# EAGLE board ZEROSTICK (EAGLE 9.6.2)
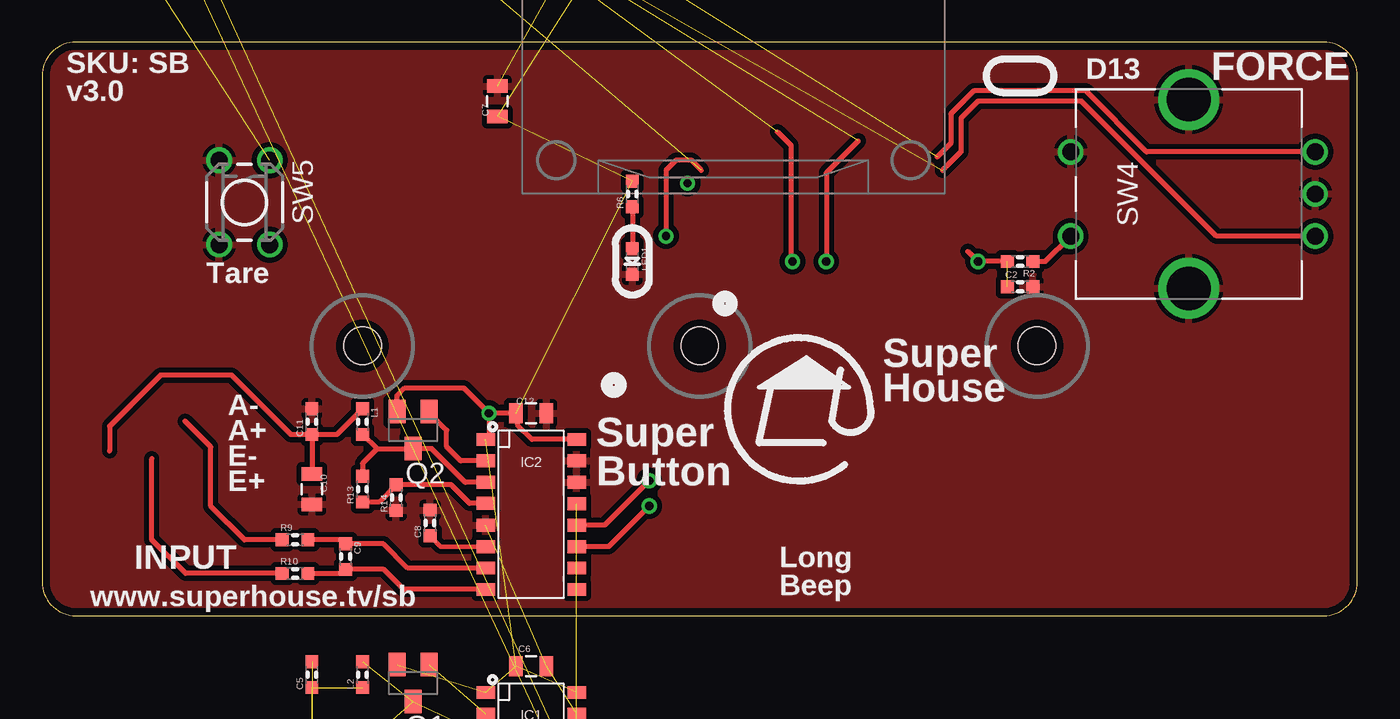
[diagram p0: board, top side]
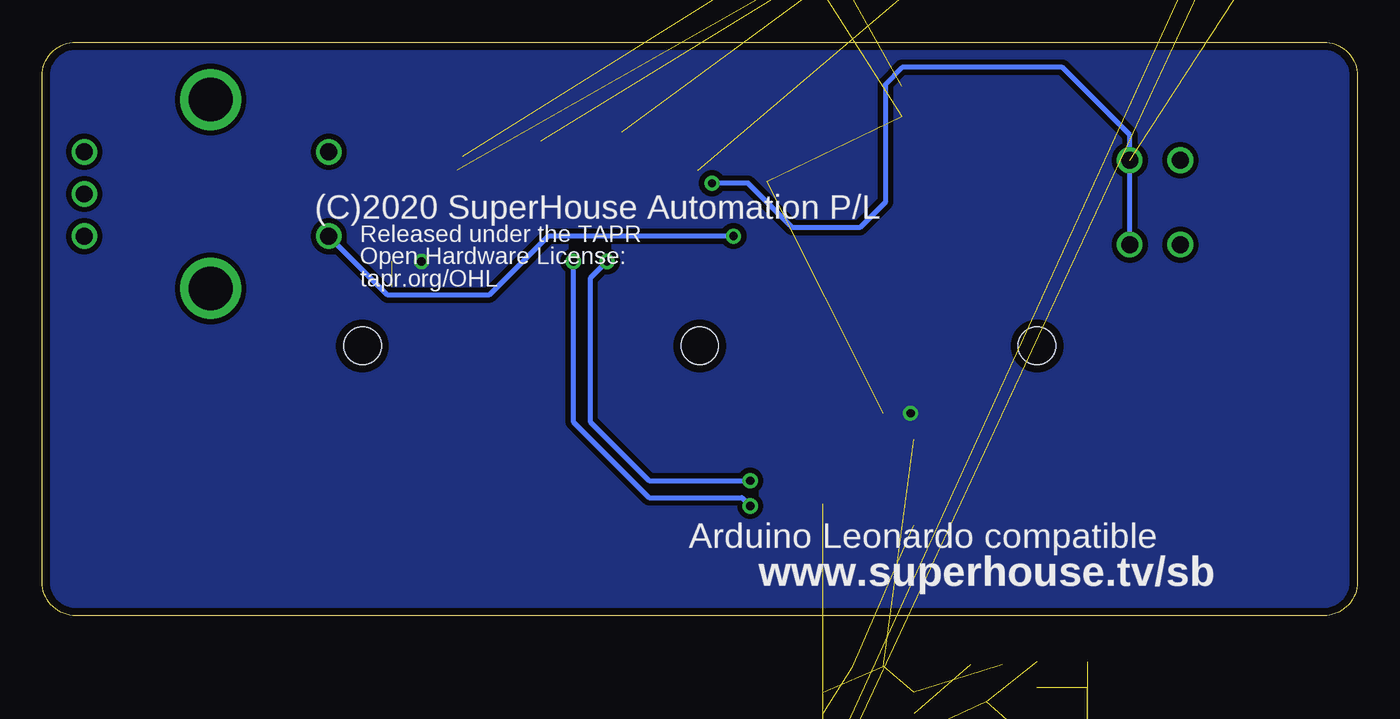
[diagram p1: board, bottom side, seen from below]

Size 78 x 34 mm. Coordinates in mm from the lower left corner, seen from the top.
Outline: 76,34 2,34 arc90 0,32 0,2 arc90 2,0 76,0 arc90 78,2 78,32 arc90 76,34
Copper layers (1*16): Top 0.035mm / dielectric 1.5mm / Bottom 0.035mm
Design rules "default *": minimum track width 10mil, minimum drill 24mil, track to track 12mil, track to pad 12mil, pad to pad 12mil, via to via 12mil, smd to smd 8mil, copper to edge 18mil, drill to drill 8mil, minimum pad ring 10mil, minimum via ring 8mil, stop-mask expansion 4mil, vias tented up to drill 0mil, thermal gap 10mil
Holes 2.2 mm at 39,16 19,16 59,16

## Footprints (pad centres in the part's own frame; a part is rotated, then mirrored left to right if it is on the bottom)
C0603 = smd 0.762 x 0.762: 1 -0.762,0; 2 0.762,0
C0805 = smd 0.8 x 1.2: 1 -0.9,0; 2 0.9,0
SOP16-L = smd 1.1 x 0.76: 1 -2.7,4.445; 2 -2.7,3.175; 3 -2.7,1.905; 4 -2.7,0.66; 5 -2.7,-0.635; 6 -2.7,-1.905; 7 -2.7,-3.175; 8 -2.7,-4.445; 9 2.7,-4.445; 10 2.7,-3.175; 11 2.7,-1.905; 12 2.7,-0.635; 13 2.7,0.635; 14 2.7,1.905; 15 2.7,3.175; 16 2.7,4.445
L0603 = smd 0.762 x 0.762: 1 -0.762,0; 2 0.762,0
LED-0603 = smd 0.762 x 0.762: A -0.762,0; C 0.762,0
XIAO-SMT = smd 3.556 x 1.778: 1 -8.128,7.62; 2 -8.128,5.08; 3 -8.128,2.54; 4 -8.128,0; 5 -8.128,-2.54; 6 -8.128,-5.08; 7 -8.128,-7.62; 8 8.128,-7.62; 9 8.128,-5.08; 10 8.128,-2.54; 11 8.128,0; 12 8.128,2.54; 13 8.128,5.08; 14 8.128,7.62
OLED-128X64-0.96-HEADER = drill 1.016 pad 1.88 square: GND -3.81,10.58 | drill 1.016 pad 1.88: SCL 1.27,10.58; SDA 3.81,10.58; VCC -1.27,10.58
SOT23-BEC = smd 1 x 1.4: B -0.95,-1.1; C 0,1.1; E 0.95,-1.1
R0603 = smd 0.762 x 0.762: 1 -0.762,0; 2 0.762,0
PEC12R = drill 1: A -2.5,-7.5; B 2.5,-7.5; C 0,-7.5; SW1 -2.5,7; SW2 2.5,7 | drill 2.6: GND@1 -5.6,0; GND@2 5.6,0
TACTILE-PTH-4.5MM = drill 1.016: 1 -2.5,1.5; 2 2.5,1.5; 3 -2.5,-1.5; 4 2.5,-1.5

## Placement (x,y rotation side)
C1  100nF  [C0603]  23,-10.5 90 top  (outside the outline)
C2  100nF  [C0603]  58,19.5 0 top
C3  100nF  [C0603]  18,-11.5 270 top  (outside the outline)
C4  10uF  [C0805]  16,-7.5 90 top  (outside the outline)
C5  100nF  [C0603]  16,-3.5 90 top
C6  10uF  [C0805]  29,-3 0 top
C7  10uF  [C0805]  27,30.5 90 top
C8  100nF  [C0603]  23,5.5 90 top
C9  100nF  [C0603]  18,3.5 270 top
C10  10uF  [C0805]  16,7.5 270 top
C11  100nF  [C0603]  16,11.5 90 top
C12  10uF  [C0805]  29,12 0 top
IC1  HX711-SOP16L  [SOP16-L]  29,-9 0 top  (outside the outline)
IC2  HX711-SOP16L  [SOP16-L]  29,6 0 top
L1  3.3uH  [L0603]  19,11.5 270 top
L2  3.3uH  [L0603]  19,-3.5 90 top
LED1  BLUE  [LED-0603]  35,21 270 top
MOD1  XIAO-SMT  [XIAO-SMT]  11,51 0 top  (outside the outline)
MOD2  OLED-I2C-128X64-0.96-HEADER  [OLED-128X64-0.96-HEADER]  41,39 0 top  (outside the outline)
Q1  2N3906  [SOT23-BEC]  22,-4 180 top
Q2  2N3906  [SOT23-BEC]  22,11 180 top
R1  100R  [R0603]  15,-10.5 0 top  (outside the outline)
R2  10K  [R0603]  58,21 180 top
R3  100R  [R0603]  15,-12.5 0 top  (outside the outline)
R4  10K  [R0603]  19,-8.5 90 top  (outside the outline)
R5  8K2  [R0603]  21,-9 90 top  (outside the outline)
R6  4K7  [R0603]  35,25 90 top
R9  100R  [R0603]  15,4.5 0 top
R10  100R  [R0603]  15,2.5 0 top
R13  10K  [R0603]  19,7.5 90 top
R14  8K2  [R0603]  21,7 90 top
SW4  Sensitivity  [PEC12R]  68,25 90 top
SW5  Tare  [TACTILE-PTH-4.5MM]  12,24.5 270 top

## Library data of the parts
C1-C12 L1 L2 Q1 Q2 R1-R6 R9 R10 R13 R14 = SuperHouse-DiscreteSemi
IC1 IC2 = SuperHouse-ICs
LED1 = SuperHouse-LEDs
MOD1 = SuperHouse-Modules
MOD2 = SuperHouse-Displays
SW4 SW5 = SuperHouse-Switches

## Nets
3.3V: C2.1 C6.1 C7.1 C12.1 IC1.1 IC1.16 IC2.1 IC2.16 MOD1.12 MOD2.VCC Q1.E Q2.E R2.2 R6.2
5V: MOD1.14
D0: IC2.12 MOD1.1
D1: IC2.11 MOD1.2
D2: IC1.12 MOD1.3
D3: IC1.11 MOD1.4
D4_SDA: MOD1.5 MOD2.SDA
D5_SCL: MOD1.6 MOD2.SCL
D6_TX: MOD1.7 SW5.1 SW5.2
D7_RX: MOD1.8 R2.1 SW4.SW1
D8_SCK: MOD1.9 SW4.A
D9_MISO: MOD1.10 SW4.B
D10_MOSI: MOD1.11
GND: C1.2 C2.2 C4.2 C5.2 C6.2 C7.2 C8.2 C10.2 C11.2 C12.2 IC1.5 IC1.14 IC1.15 IC2.5 IC2.14 IC2.15 LED1.C MOD1.13 MOD2.GND R5.1 R14.1 SW4.C SW4.GND@1 SW4.GND@2 SW4.SW2 SW5.3 SW5.4
N$1: C3.1 IC1.7 R1.2
N$2: C3.2 IC1.8 R3.2
N$3: C1.1 IC1.6
N$4: IC1.2 Q1.B
N$5: LED1.A R6.1
N$6: IC1.4 R4.1 R5.2
N$7: IC1.3 L2.2 Q1.C R4.2
N$14: C9.1 IC2.7 R9.2
N$15: C9.2 IC2.8 R10.2
N$16: IC2.3 L1.2 Q2.C R13.2
N$17: C8.1 IC2.6
N$20: IC2.2 Q2.B
N$21: IC2.4 R13.1 R14.2
X_A+: R10.1
X_A-: R9.1
X_E+: C10.1 C11.1 L1.1
XO: IC1.13 IC2.13
Y_A+: R3.1
Y_A-: R1.1
Y_E+: C4.1 C5.1 L2.1

## Tracks (layer width: path | path; a pad name or v marks a point on that pad's centre or on a via)
3.3V  (via drill 0.5)  (9 unrouted)
  Top 0.254: 26.36,10.5 IC2.1 26.5,10.64
  Top 0.305: IC2.16 29.03,10.45 28.24,11.24 C12.1 v26.5,12 | v26.5,12 26.5,10.64 | Q2.E 21.05,13.05 21.5,13.5 25,13.5 v26.5,12 | 54.9,21.6 v55.5,21 R2.2
  pour Bottom: 76,0 2,0 arc-90 0,2 0,32 arc-90 2,34 76,34 arc-90 78,32 78,2 arc-90
D0  (via drill 0.5)  (1 unrouted)
  Top 0.305: 43.6,28.69 44.41,27.88 44.41,21.09 v44.5,21 | v36,8 33.37,5.37 IC2.12
  Bottom 0.305: v44.5,21 45.5,20 45.5,11.5 42,8 v36,8
D1  (via drill 0.5)  (1 unrouted)
  Top 0.305: v46.5,21 46.5,26.25 48.4,28.15 | v36,6.5 33.59,4.09 IC2.11
  Bottom 0.305: v46.5,21 46.5,11.5 42,7 36.5,7 v36,6.5
D2  (1 unrouted)
D3  (1 unrouted)
D4_SDA  (1 unrouted)
D5_SCL  (1 unrouted)
D6_TX  (via drill 0.5)  (1 unrouted)
  Top 0.305: 38.31,25.6 v38.27,25.64
  Bottom 0.305: SW5.2 SW5.1 13.5,28.5 17.5,32.5 27,32.5 28,31.5 28,24.5 29.5,23 33.5,23 36.14,25.64 v38.27,25.64
D7_RX  (via drill 0.5)  (1 unrouted)
  Top 0.305: v37,22.5 37,26.4 37.6,27 38.5,27 39.1,26.4 | R2.1 59.5,21 SW4.SW1
  Bottom 0.305: v37,22.5 48,22.5 51.5,19 57.5,19 SW4.SW1
D8_SCK  (1 unrouted)
  Top 0.305: SW4.A 69.64,22.5 61.64,30.5 55.5,30.5 54.5,29.5 54.5,27.5 53.4,26.4
D9_MISO  (1 unrouted)
  Top 0.305: SW4.B 65.5,27.5 61.89,31.11 55.25,31.11 53.89,29.75 53.89,28 53.09,27.2
GND  (10 unrouted)
  pour Top: 76,0 2,0 arc-90 0,2 0,32 arc-90 2,34 76,34 arc-90 78,32 78,2 arc-90
N$1  (2 unrouted)
N$2  (2 unrouted)
N$3  (1 unrouted)
N$4  (1 unrouted)
N$5
  Top 0.305: R6.1 LED1.A
N$6  (2 unrouted)
N$7  (3 unrouted)
N$14
  Top 0.254: C9.1 17.76,4.5
  Top 0.305: 17.76,4.5 R9.2 | IC2.7 21.68,2.83 20.24,4.26 C9.1
N$15
  Top 0.254: 17.76,2.5 C9.2
  Top 0.305: R10.2 17.76,2.5 | IC2.8 21.45,1.55 20.26,2.74 C9.2
N$16
  Top 0.305: IC2.3 25.09,7.91 23.1,9.9 Q2.C 21.98,9.88 19.86,9.88 | 19.86,9.88 L1.2 | 19.86,9.88 19,9.02 R13.2
N$17
  Top 0.254: IC2.6 23.64,4.09 C8.1
N$20
  Top 0.254: 22.95,12.05 Q2.B
  Top 0.305: IC2.2 24.82,9.18 24,10 24,11 22.95,12.05
N$21
  Top 0.305: R13.1 19.98,6.74 R14.2 24.24,7.76 25.34,6.66 IC2.4
X_A+
  Top 0.305: R10.1 8.5,2.5 6.5,4.5 6.5,9.31
X_A-
  Top 0.305: R9.1 12,4.5 10,6.5 10,10 8.47,11.53
X_E+
  Top 0.305: L1.1 17.48,10.74 C11.1 | C11.1 C10.1 | C11.1 14.76,10.74 11.24,14.26 7.02,14.26 4,11.24 4,9.77
XO  (1 unrouted)
Y_E+  (2 unrouted)

## Text on the board
tPlace: D13 | FORCE | SKU: SB / v3.0 | Tare | Super / House | A- | A+ | E- | E+ | Super / Button | INPUT | www.superhouse.tv/sb | Long / Beep
bPlace: (C)2020 SuperHouse Automation P/L | Released under the TAPR / Open Hardware License: / tapr.org/OHL | Arduino Leonardo compatible | www.superhouse.tv/sb